# Altium PCB PCB.PcbDoc (part 1 of 2)
Units mm, origin at the board's own origin, x right, y up, seen from the top; angles counter-clockwise.
Board outline 94 x 82 mm, 2 copper layers (Top Layer, Bottom Layer); 51 components, 51 nets, 202 pads, 619 vias.
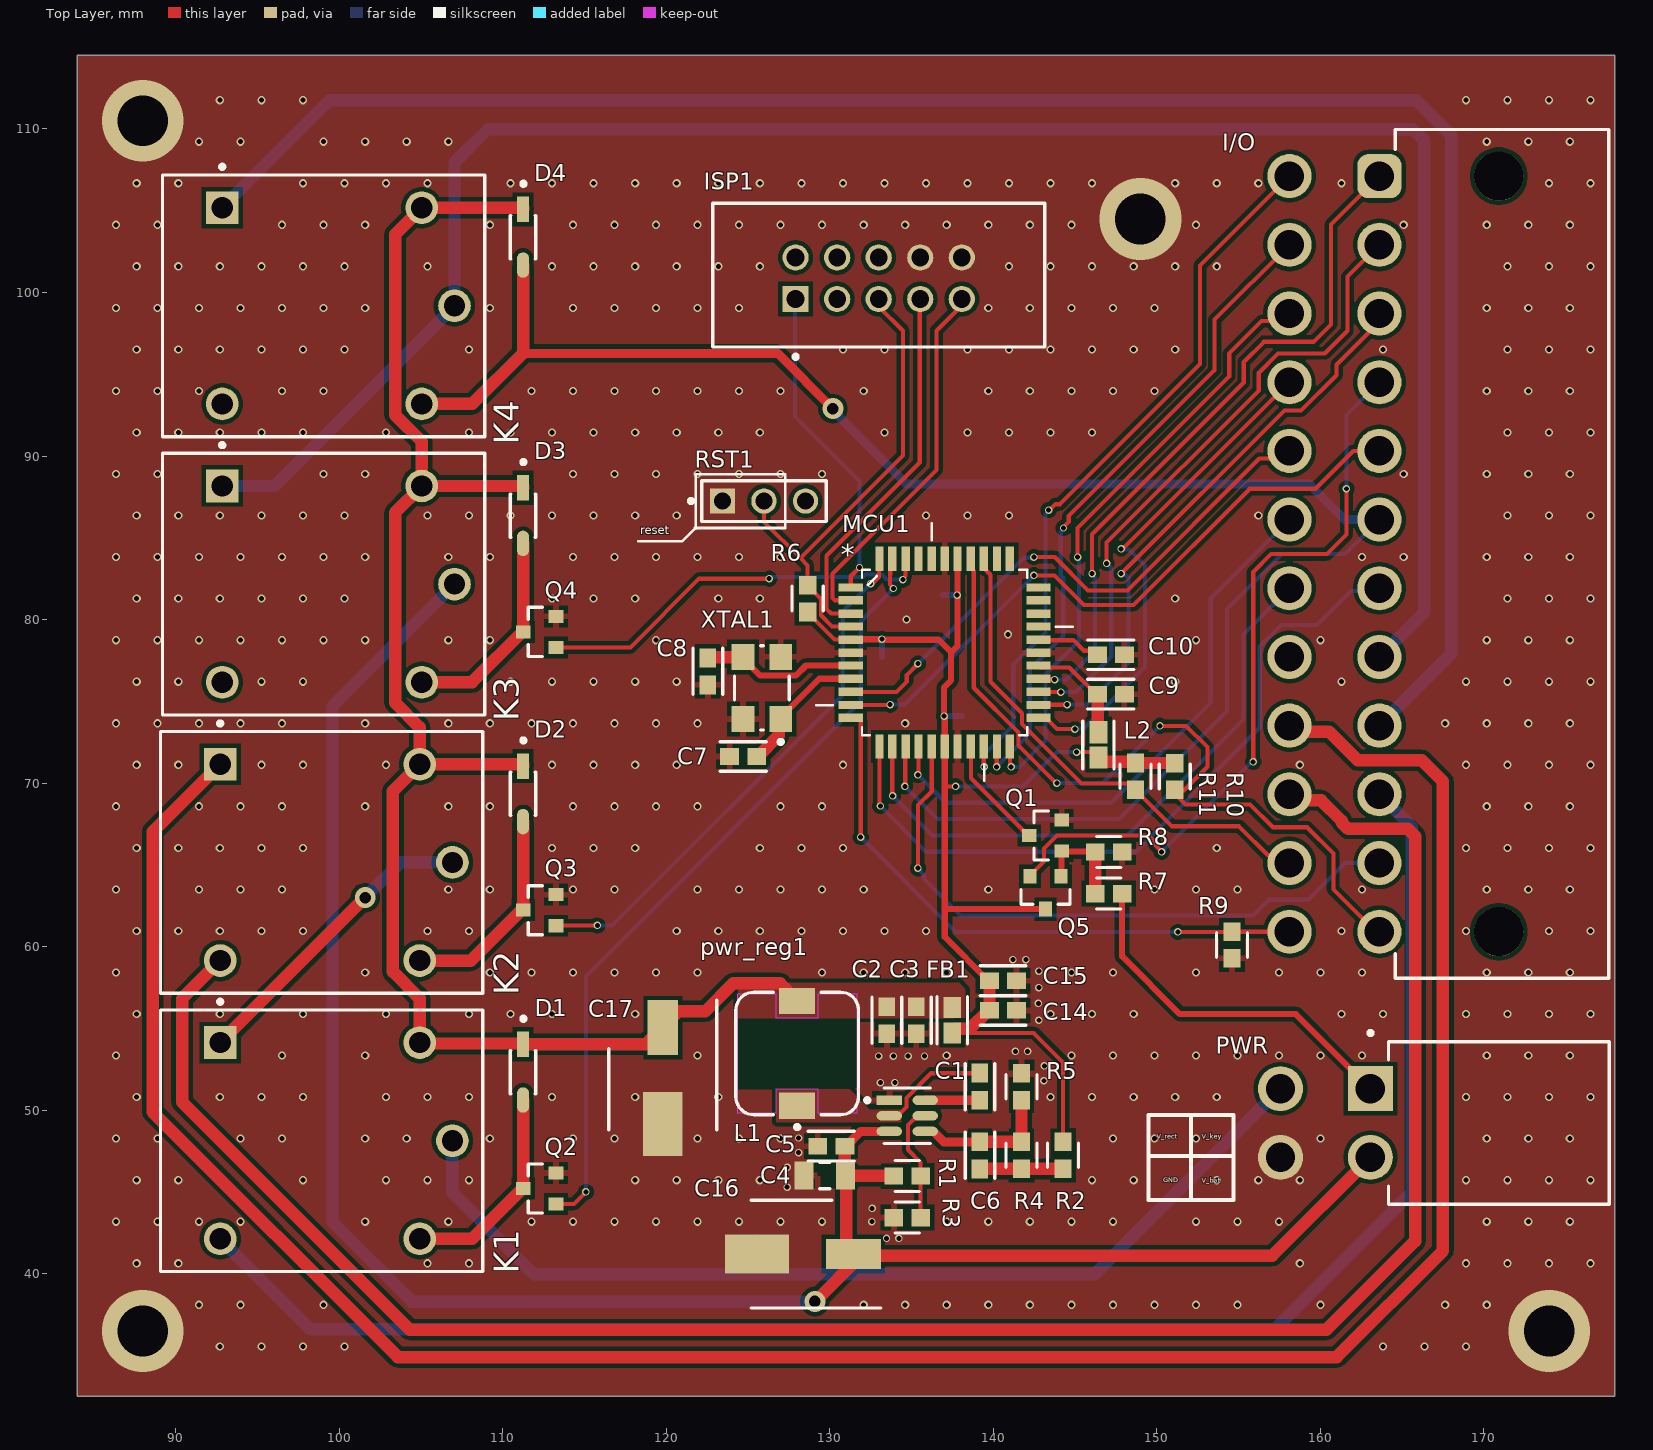
[diagram p0: Top Layer view]
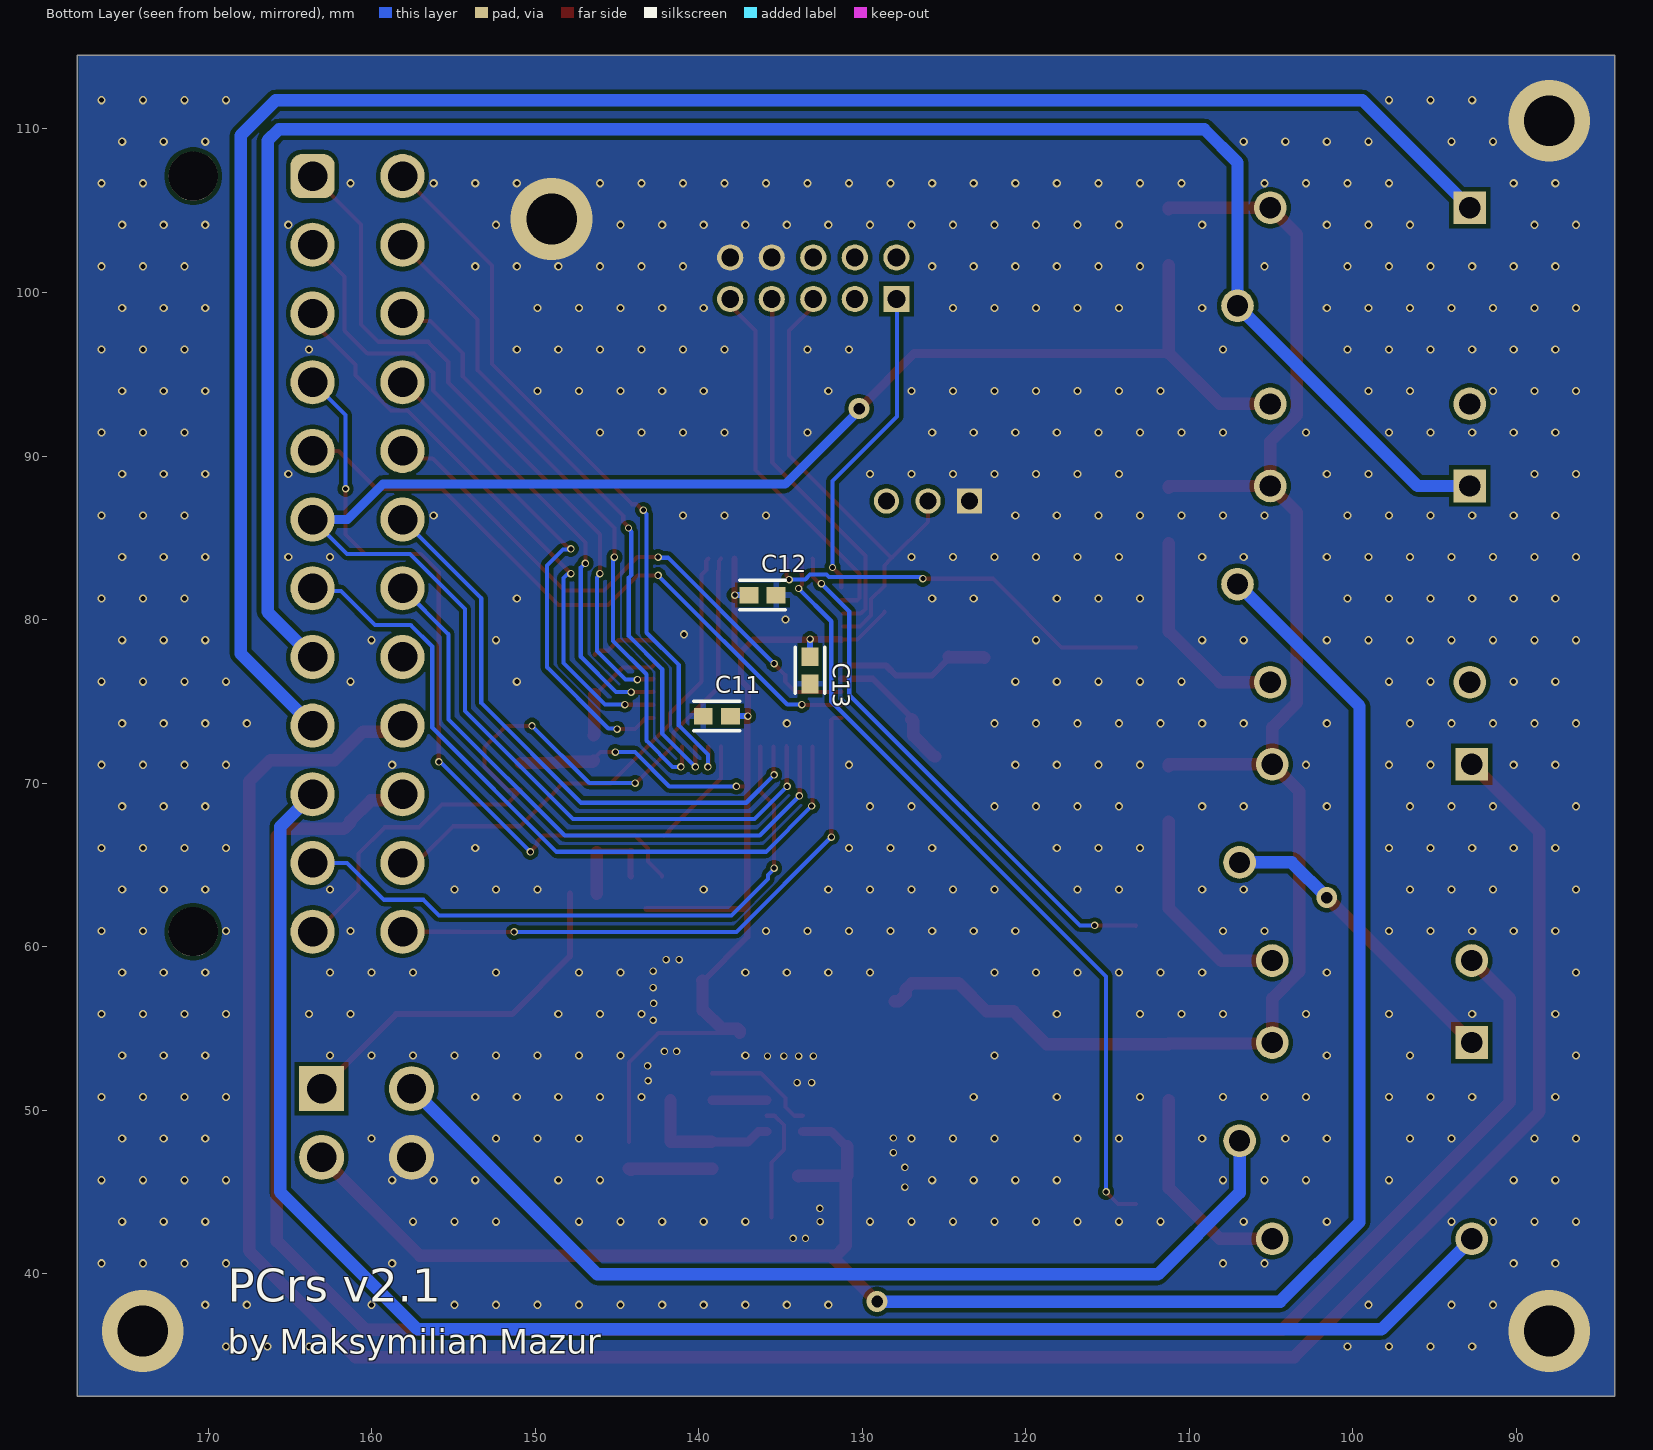
[diagram p1: Bottom Layer view, seen from below]
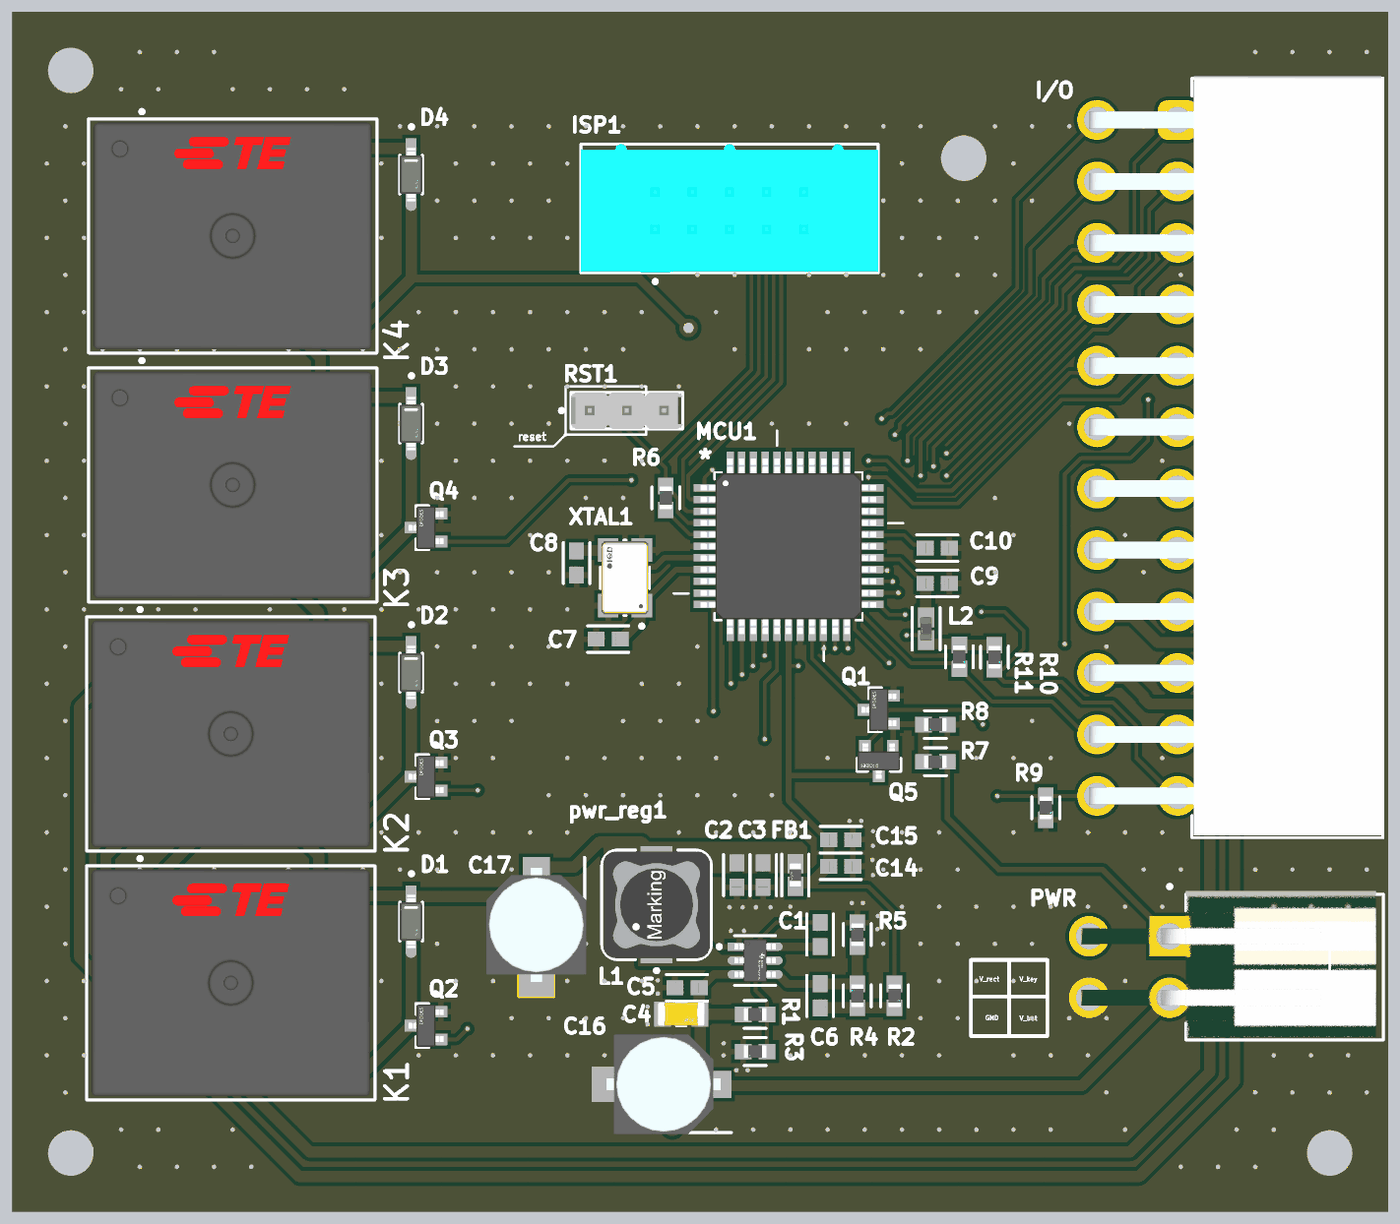
[diagram p2: 3D render of the assembled board from above, using the file's embedded part models]
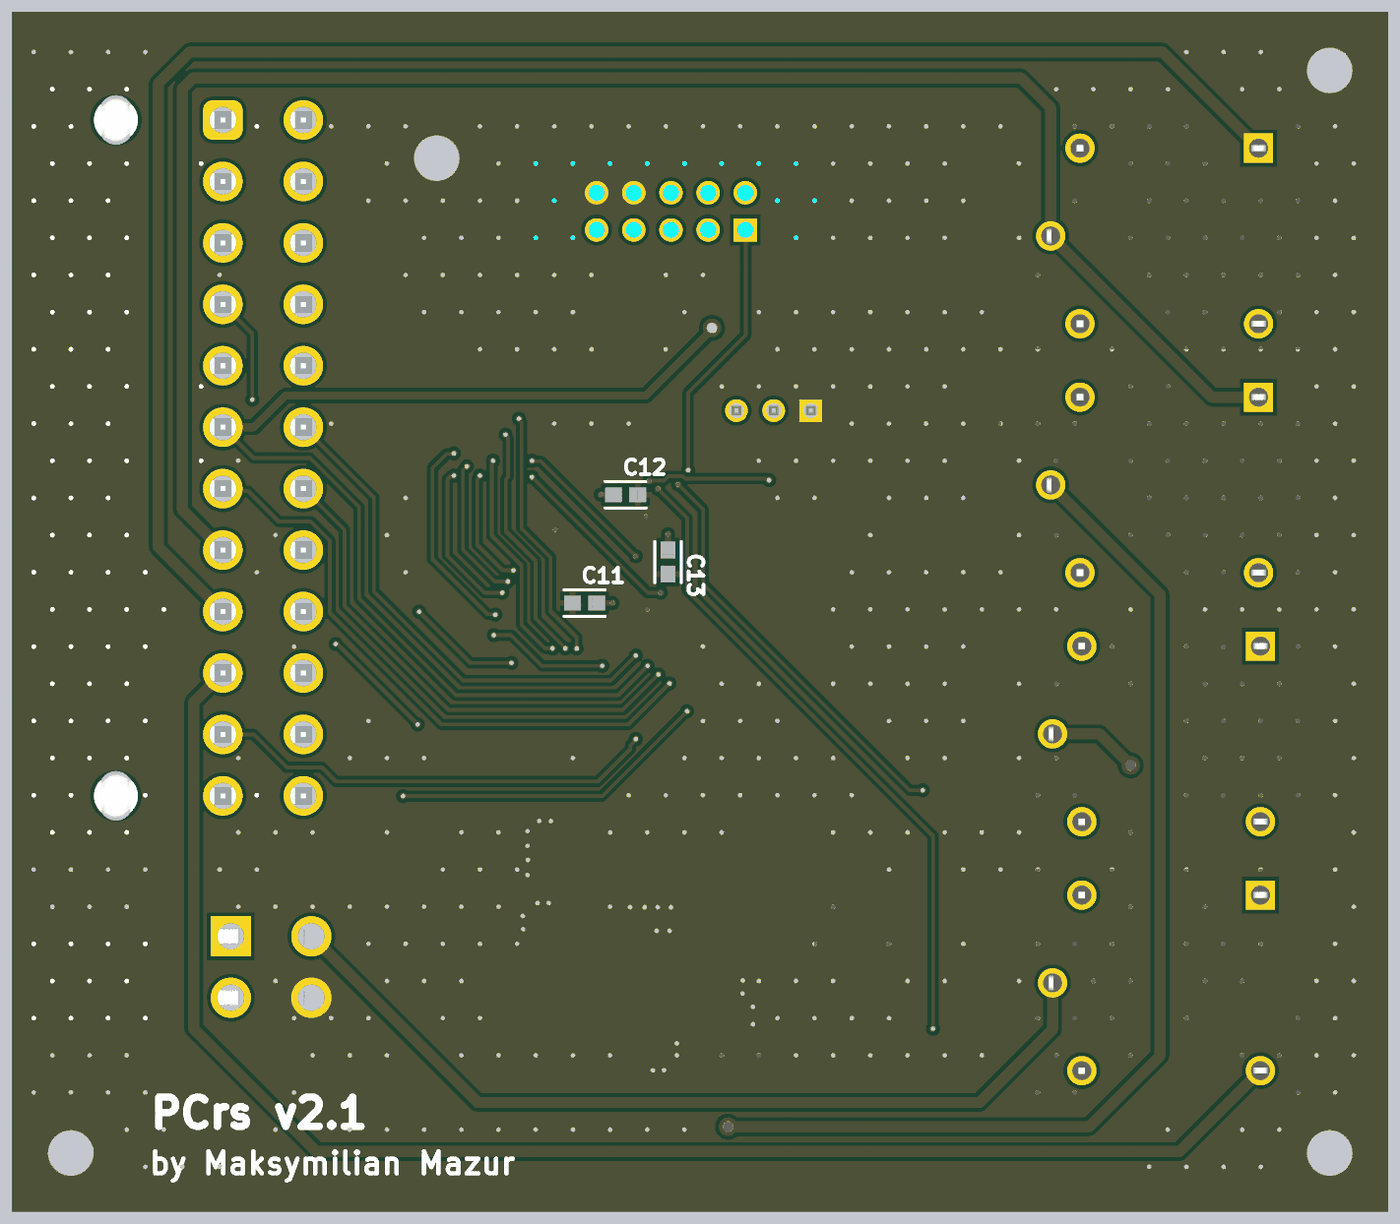
[diagram p3: 3D render of the assembled board from below, using the file's embedded part models]

## Layer stack, top to bottom
Top Solder: solder mask 0.0102, Solder Resist, Dk 3.5
Top Layer: signal copper 0.0356
Dielectric 1: dielectric 0.32, FR-4, Dk 4.8
Bottom Layer: signal copper 0.0356
Bottom Solder: solder mask 0.0102, Solder Resist, Dk 3.5

## Board outline
84,114.5 178,114.5 178,32.5 84,32.5

## Design rules (kind name [scope] priority, off if disabled: settings)
AssemblyTestPointUsage [All] p1: isadvanced=TRUE
AssemblyTestpoint [All] p1: isadvanced=TRUE testpointundercomponent=TRUE minsize=1.016 maxsize=2.54 preferedsize=1.524 minholesize=0 maxholesize=1.016 preferedholesize=0.813 testpointgrid=0.025 usegrid=TRUE gridtolerance=0 allowsidetop=TRUE allowsidebottom=TRUE
Clearance myClearance_1 [OnMid vs OnMid] p1: gap=0.254 ignorepadtopadclearanceinfootprint=FALSE except(0: Hole-Hole; 0.102: Arc-Arc Arc-Track Arc-Text Track-Track Track-Text Text-Text; 0.152: Arc-SMDPad Track-SMDPad SMDPad-SMDPad SMDPad-Text; 0.203: Arc-Via Track-Via Via-Text)
Clearance myClearance_2 [(ExistsOnLayer('Top Layer') Or ExistsOnLayer('Bottom Layer')) vs (ExistsOnLayer('Top Layer') Or ExistsOnLayer('Bottom Layer'))] p2: gap=0.254 ignorepadtopadclearanceinfootprint=FALSE except(0: Hole-Hole; 0.102: Arc-Arc Arc-Track Arc-Text Track-Track Track-Text Text-Text; 0.152: Arc-SMDPad Track-SMDPad SMDPad-SMDPad SMDPad-Text; 0.203: Arc-Via Track-Via Via-Text)
Clearance myClearance [All] p3: gap=0.254 ignorepadtopadclearanceinfootprint=FALSE
Clearance Clearance_1 [OnMid vs OnMid] p4: gap=0.254 ignorepadtopadclearanceinfootprint=FALSE except(0: Hole-Hole; 0.102: Arc-Arc Arc-Track Arc-Text Track-Track Track-Text Text-Text; 0.152: Arc-SMDPad Track-SMDPad SMDPad-SMDPad SMDPad-Text; 0.203: Arc-Via Track-Via Via-Text) sourcerule=54 cellrowname=All cellrowtype=0 cellcolname=All cellcoltype=0 innerlayers=TRUE
Clearance Clearance_2 [(ExistsOnLayer('Top Layer') Or ExistsOnLayer('Bottom Layer')) vs (ExistsOnLayer('Top Layer') Or ExistsOnLayer('Bottom Layer'))] p5: gap=0.254 ignorepadtopadclearanceinfootprint=FALSE except(0: Hole-Hole; 0.102: Arc-Arc Arc-Track Arc-Text Track-Track Track-Text Text-Text; 0.152: Arc-SMDPad Track-SMDPad SMDPad-SMDPad SMDPad-Text; 0.203: Arc-Via Track-Via Via-Text) sourcerule=54 cellrowname=All cellrowtype=0 cellcolname=All cellcoltype=0 outerlayers=TRUE
Clearance [All] p6 off: gap=0.254 ignorepadtopadclearanceinfootprint=FALSE ismatrix=TRUE
ComponentClearance [All] p1: isadvanced=TRUE gap=0.254 collisioncheckmode=3 verticalgap=0.254 showdistances=FALSE
FabricationTestPointUsage [All] p1: isadvanced=TRUE valid=0 allowmultiple=FALSE
FabricationTestpoint [All] p1: isadvanced=TRUE side=3 testpointundercomponent=TRUE minsize=1.016 maxsize=2.54 preferedsize=1.524 minholesize=0 maxholesize=1.016 preferedholesize=0.813 testpointgrid=0.025 allowsidetop=TRUE allowsidebottom=TRUE usegrid=TRUE gridtolerance=0
FanoutControl Fanout_BGA [IsBGA] p1: isadvanced=TRUE bgadir=Out bgaviamode=Centered fanoutstyle=Auto fanoutdirection=Alternating viagrid=0.025 // Fanout_BGA (Default Rule)
FanoutControl Fanout_LCC [IsLCC] p2: isadvanced=TRUE bgadir=Out bgaviamode=Centered fanoutstyle=Auto fanoutdirection=Alternating viagrid=0.025 // Fanout_LCC (Default Rule)
FanoutControl Fanout_SOIC [IsSOIC] p3: isadvanced=TRUE bgadir=Out bgaviamode=Centered fanoutstyle=Auto fanoutdirection=Alternating viagrid=0.025 // Fanout_SOIC (Default Rule)
FanoutControl Fanout_Small [(CompPinCount < 5)] p4: isadvanced=TRUE bgadir=Out bgaviamode=Centered fanoutstyle=Auto fanoutdirection=OutThenIn viagrid=0.025 // Fanout_Small (Default Rule)
FanoutControl Fanout_Default [All] p5: isadvanced=TRUE bgadir=Out bgaviamode=Centered fanoutstyle=Auto fanoutdirection=Alternating viagrid=0.025 // Fanout_Default (Default Rule)
Height [All] p1: isadvanced=TRUE minheight=0 maxheight=25.4 prefheight=12.7
HoleSize "MaxMinHoleSize JLCPCB" [All] p1: isadvanced=TRUE absolutevalues=TRUE maxlimit=6.299 minlimit=0.152 maxpercent=80.000 minpercent=20.000
HoleSize [All] p2 off: isadvanced=TRUE absolutevalues=TRUE maxlimit=2.54 minlimit=0.025 maxpercent=80.000 minpercent=20.000
HoleToHoleClearance [All] p1: isadvanced=TRUE gap=0.254 allowstackedmicrovias=TRUE
LayerPairs [All] p1: isadvanced=TRUE enforce=TRUE
MinimumSolderMaskSliver [All] p1: isadvanced=TRUE minsoldermaskwidth=0.254
NetAntennae [All] p1: isadvanced=TRUE netantennaetolerance=0
PasteMaskExpansion [All] p1 off: isadvanced=TRUE expansion=0
PlaneClearance [All] p1: isadvanced=TRUE clearance=0.508
PlaneConnect [All] p1: isadvanced=TRUE planeconnectstyle=Relief reliefexpansion=0.508 reliefentries=4 reliefconductorwidth=0.254 reliefairgap=0.254
PolygonConnect PolygonConnectStyle_3 [InNetClass('NewClass')] p1: connectstyle=Direct reliefconductorwidth=0.254 reliefentries=4 polygonreliefangle="90 Angle" airgapwidth=0.254
RoutingCorners [All] p1: isadvanced=TRUE cornerstyle=45-Degree minsetback=2.54 maxsetback=2.54
RoutingPriority [All] p1: isadvanced=TRUE routingpriority=0
RoutingVias "RoutingVias JLCPCB_2" [All] p1 off: isadvanced=TRUE holewidth=0.305 width=0.457 viastyle="Through Hole" minholewidth=0.152 minwidth=0.254 maxholewidth=0.711 maxwidth=1.27
ShortCircuit [All] p1: isadvanced=TRUE allowed=FALSE
SilkToSilkClearance [All] p1: isadvanced=TRUE silktosilkclearance=0.254
SilkToSolderMaskClearance [IsPad] p1: isadvanced=TRUE minsilkscreentomaskgap=0.254 clearancetoexposedcopper=TRUE
SolderMaskExpansion [IsVia] p1: isadvanced=TRUE expansion=0.102 istentingtop=TRUE
SupplyNets "Schematic Supply Nets_15" [InNet('VCC_rect')] p1: voltage=0.000
SupplyNets "Schematic Supply Nets_12" [InNet('VCC_k')] p2: voltage=0.000
SupplyNets "Schematic Supply Nets_11" [InNet('VCC_bat')] p3: voltage=0.000
SupplyNets "Schematic Supply Nets_10" [InNet('GND')] p4: voltage=0.000
SupplyNets "Schematic Supply Nets_9" [InNet('VCC_k')] p5: isadvanced=TRUE voltage=0.000
SupplyNets "Schematic Supply Nets_8" [InNet('VCC_bat')] p6: isadvanced=TRUE voltage=0.000
SupplyNets "Schematic Supply Nets_7" [InNet('VCC_rect')] p7: isadvanced=TRUE voltage=0.000
SupplyNets "Schematic Supply Nets_5" [InNet('GND')] p8: isadvanced=TRUE voltage=0.000
SupplyNets "Schematic Supply Nets_3" [InNet('VCC_rect')] p9: isadvanced=TRUE voltage=0.000
SupplyNets "Schematic Supply Nets_2" [InNet('VCC_bat')] p10: isadvanced=TRUE voltage=0.000
SupplyNets "Schematic Supply Nets_1" [InNet('VCC_k')] p11: isadvanced=TRUE voltage=0.000
SupplyNets "Schematic Supply Nets" [InNet('GND')] p12: isadvanced=TRUE voltage=0.000
SupplyNets "Schematic Supply Nets_19" [InNet('V_reg')] p13: isadvanced=TRUE voltage=0.000
SupplyNets "Schematic Supply Nets_14" [InNet('VCC_rect')] p14: isadvanced=TRUE voltage=0.000
UnRoutedNet [All] p1: isadvanced=TRUE
UnpouredPolygon [All] p1: isadvanced=TRUE
Width [All] p1: maxlimit=0.762 minlimit=0.254 preferedwidth=0.381 minimp=50.000000 maximp=50.000000 favimp=50.000000
4 further rules are at their usual default settings.

## Components (designator, comment, footprint, x,y, rotation, side; value= is the part's Value field where it differs from the comment)
C1 "0.1uF" FP-CL10-IPC_A 139.192,51.435 r90 top
C2 "22uF" FP-CL10-IPC_A 133.5,55.5 r270 top
C3 "22uF" FP-CL10-IPC_A 135.3,55.5 r270 top
C4 "10uF" FP-CL31-IPC_C 129.7,46 r180 top
C5 "1uF" FP-CL10-IPC_A 130.1,47.8 r180 top
C6 "75pF" FP-CL10-IPC_A 139.192,47.244 r90 top
C7 "22pF" FP-CL10-IPC_A 124.714,71.628 r0 top
C8 "22pF" FP-CL10-IPC_A 122.555,76.835 r90 top
C9 "100nF" FP-CL10-IPC_A 147.193,75.438 r0 top
C10 "100nF" FP-CL10-IPC_A 147.193,77.851 r0 top
C11 "22uF" FP-CL10-IPC_A 138.9,74.1 r0 bottom
C12 "10uF" FP-CL10-IPC_A 136.1,81.5 r180 bottom
C13 "10uF" FP-CL10-IPC_A 133.2,76.9 r270 bottom
C14 "22uF" FP-CL10-IPC_A 140.6,56.1 r0 top
C15 "22uF" FP-CL10-IPC_A 140.604,57.922 r0 top
C16 "220uF" CAPAE660X810N#1 128.5,41.2 r180 top
C17 "220uF" CAPAE660X810N#2 119.8,52.1 r270 top locked
D1 "1N5819HW-7-F" FP-SOD123-IPC_A 111.252,52.324 r270 top
D2 "1N5819HW-7-F" FP-SOD123-IPC_A 111.252,69.342 r270 top
D3 "1N5819HW-7-F" FP-SOD123-IPC_A 111.252,86.36 r270 top
D4 "1N5819HW-7-F" FP-SOD123-IPC_A 111.252,103.378 r270 top
FB1 "test" FP-BLM18-0_15-t0_8-IPC_A 137.5,55.5 r270 top
I/O "I/O" 649024227222 171.115,84.015 r90 top
ISP1 "30310-6002HB" 3M-30310-6002HB-10_V 133,100.87 r0 top
K1 "RM51-3011-85-1005" FP-1-1721150-0-MFG 98.933,48.133 r0 top
K2 "RM51-3011-85-1005" FP-1-1721150-0-MFG 98.933,65.151 r0 top
K3 "RM51-3011-85-1005" FP-1-1721150-0-MFG 99.06,82.169 r0 top
K4 "RM51-3011-85-1005" FP-1-1721150-0-MFG 99.06,99.187 r0 top
L1 "pwr_inductor" WE-PD_7345 128.016,53.467 r90 top
L2 "10uH" FP-CBMF1608-IPC_A 146.431,72.336 r270 top
MCU1 "ATMEGA32A-AU" QFP80P1200X1200X120-44N 137.033,77.978 r0 top
PWR "power" FP-1586042-4-MFG 170.668,49.217 r90 top
pwr_reg1 "TPS54202DDCR" FP-DDC0006A-IPC_B 134.747,49.657 r0 top
Q1 "2N7002-7-F" FP-SOT23-MFG 143.2,66.8 r180 top
Q2 "2N7002-7-F" FP-SOT23-MFG 112.268,45.212 r180 top
Q3 "2N7002-7-F" FP-SOT23-MFG 112.268,62.23 r180 top
Q4 "2N7002-7-F" FP-SOT23-MFG 112.268,79.248 r180 top
Q5 "2N7002-7-F" FP-SOT23-MFG 143.2,63.3 r270 top
R1 "511k" FP-CRCW0603-e3-IPC_A 134.747,45.974 r0 top
R2 "49.9R" FP-CRCW0603-e3-IPC_A 144.272,47.244 r270 top
R3 "105k" FP-CRCW0603-e3-IPC_A 134.747,43.434 r180 top
R4 "100k" FP-CRCW0603-e3-IPC_A 141.732,47.244 r90 top
R5 "13.3k" FP-CRCW0603-e3-IPC_A 141.732,51.435 r90 top
R6 "10k" FP-CRCW0603-e3-IPC_A 128.651,81.28 r90 top
R7 "220k" FP-CRCW0603-e3-IPC_A 147.066,63.246 r0 top
R8 "150k" FP-CRCW0603-e3-IPC_A 147.066,65.786 r180 top
R9 "10k" FP-CRCW0603-e3-IPC_A 154.6,60.1 r270 top
R10 "10k" FP-CRCW0603-e3-IPC_A 151.1,70.4 r270 top
R11 "50k" FP-CRCW0603-e3-IPC_A 148.7,70.415 r270 top
RST1 "rst" MOLX-22-28-4033_V 125.984,87.249 r0 top
XTAL1 "8MHz" FP-LFXTAL055663REEL-MFG 125.857,75.819 r90 top

## Footprints (in the part's own frame and the unit in brackets; to place one, negate y for a bottom-side part, rotate by r counter-clockwise, add the part's x,y. Pads: shape width x height; smd on the part's side, far side on the other; paste and mask are expansions set on the pad)
3M-30310-6002HB-10_V [mm] "CONN, 10-Leads, Body 20.3x8.4mm, Pitch 2.54mm"
  rect 1.6x1.6 hole 1.09: 1(-5.08,-1.27)
  round 1.6 hole 1.09: 2(-5.08,1.27) 3(-2.54,-1.27) 4(-2.54,1.27) 5(0,-1.27) 6(0,1.27) 7(2.54,-1.27) 8(2.54,1.27) 9(5.08,-1.27) 10(5.08,1.27)
  silkscreen extent -10.15,-4.92 10.15,4.58, body extent -10.15,-4.2 10.15,4.61, height 8.89
649024227222 [mm] "4.20mm Male Dual Row Angled Header with Mounting Pegs, 24p"
  rrect50% 2.7x2.7 hole 1.8: 1(23.1,7.5)
  round 2.7 hole 1.8: 2(18.9,7.5) 3(14.7,7.5) 4(10.5,7.5) 5(6.3,7.5) 6(2.1,7.5) 7(-2.1,7.5) 8(-6.3,7.5) 9(-10.5,7.5) 10(-14.7,7.5) 11(-18.9,7.5) 12(-23.1,7.5) 13(23.1,13) 14(18.9,13) 15(14.7,13) 16(10.5,13) 17(6.3,13) 18(2.1,13) 19(-2.1,13) 20(-6.3,13) 21(-10.5,13) 22(-14.7,13) 23(-18.9,13) 24(-23.1,13)
  round 3 hole 3 unplated: MH1(-23.1,0.2) MH2(23.1,0.2)
  silkscreen extent -25.95,-6.52 25.95,6.52, body extent -25.8,-6.4 26.1,13.57, height 11.43
CAPAE660X810N#1 [mm]
  rect 3.35x1.85 smd: 1(-2.95,0)
  rect 3.9x2.4 smd: 2(2.95,0)
  silkscreen extent -4.62,-3.3 3.3,3.3, body extent -3.9,-3.4 3.9,3.4, height 8.1
CAPAE660X810N#2 [mm]
  rect 3.35x1.85 smd: 1(-2.95,0)
  rect 3.9x2.4 smd mask+0.102: 2(2.95,0)
  silkscreen extent -4.62,-3.3 3.3,3.3, body extent -3.9,-3.4 3.9,3.4, height 8.1
FP-1-1721150-0-MFG [mm]
  rect 2x2 hole 1.3 paste-2539.97 mask+0: 1(-6.2,6)
  round 2 hole 1.3 paste-2539.97 mask+0: 2(6,6) 3(8,0) 4(-6.2,-6) 5(6,-6)
  silkscreen extent -9.85,-8 9.85,8.62, body extent -9.95,-8.1 9.95,8.1, height 0.25
FP-1586042-4-MFG [mm]
  rect 2.75x2.75 hole 1.8 paste-2539.97 mask+0: 1(2.1,7.6)
  round 2.75 hole 1.8 paste-2539.97 mask+0: 2(-2.1,7.6) 3(2.1,13.1) 4(-2.1,13.1)
  silkscreen extent -4.97,-7 5.62,7.72, body extent -5.07,-7.1 5.07,14.58, height 0.25
FP-BLM18-0_15-t0_8-IPC_A [mm]
  rect 1.306x1.058 smd paste+0 mask+0: 1(-0.776,0) 2(0.776,0)
  silkscreen extent -1.43,-0.93 1.43,0.93, body extent -1.93,-1.03 1.93,1.03, height 0.25
FP-CBMF1608-IPC_A [mm]
  rect 1.355x1.106 smd paste+0 mask+0: 1(-0.775,0) 2(0.775,0)
  silkscreen extent -1.45,-0.95 1.45,0.95, body extent -1.95,-1.05 1.95,1.05, height 0.25
FP-CL10-IPC_A [mm]
  rect 1.158x1.012 smd paste+0 mask+0: 1(-0.827,0) 2(0.827,0)
  silkscreen extent -1.41,-0.91 1.41,0.91, body extent -1.91,-1.01 1.91,1.01, height 0.25
FP-CL31-IPC_C [mm]
  rect 1.154x1.706 smd paste+0 mask+0: 1(-1.276,0) 2(1.276,0)
  silkscreen extent -0.32,-0.8 0.32,0.8, body extent -1.95,-1 1.95,1, height 0.25
FP-CRCW0603-e3-IPC_A [mm]
  rect 1.135x1.062 smd paste+0 mask+0: 1(-0.815,0) 2(0.815,0)
  silkscreen extent -0.75,-0.95 0.75,0.95, body extent -1.88,-1.03 1.88,1.03, height 0.25
FP-DDC0006A-IPC_B [mm]
  rect 1.554x0.572 smd paste+0 mask+0: 1(-1.1,0.95)
  rrect100% 1.554x0.572 smd paste+0 mask+0: 2(-1.1,0) 3(-1.1,-0.95) 4(1.1,-0.95) 5(1.1,0) 6(1.1,0.95)
  silkscreen extent -2.57,-1.7 1.4,1.7, body extent -2.13,-1.7 2.13,1.7, height 0.25
FP-LFXTAL055663REEL-MFG [mm]
  rect 1.6x1.4 smd paste+0 mask+0: 1(-1.9,-1.15) 2(1.9,-1.15) 3(1.9,1.15) 4(-1.9,1.15)
  silkscreen extent -3.42,-1.67 2.58,1.67, body extent -2.8,-1.95 2.8,1.95, height 0.25
FP-SOD123-IPC_A [mm]
  rect 1.557x0.742 smd paste+0 mask+0: 1(-1.7,0)
  rrect100% 1.557x0.742 smd paste+0 mask+0: 2(1.7,0)
  silkscreen extent -3.39,-0.78 1.33,0.78, body extent -2.98,-1.28 2.98,1.28, height 0.25
FP-SOT23-MFG [mm]
  rect 0.9x0.8 smd paste+0 mask+0: 1(-1,0.95) 2(-1,-0.95) 3(1,0)
  silkscreen extent -0.18,-1.5 0.7,1.5, body extent -1.55,-1.6 1.55,1.6, height 0.25
MOLX-22-28-4033_V [mm] "THD, 3-Leads, Body 7.62x2.49mm, Pitch 2.54mm"
  rect 1.55x1.55 hole 1.02: 1(-2.54,0)
  round 1.55 hole 1.02: 2(0,0) 3(2.54,0)
  silkscreen extent -4.58,-1.25 3.81,1.25, body extent -3.81,-1.24 3.81,1.24, height 8.38
QFP80P1200X1200X120-44N [mil]
  rect 58x20 smd: 1(-226,157) 2(-226,126) 3(-226,94) 4(-226,63) 5(-226,31) 6(-226,0) 7(-226,-31) 8(-226,-63) 9(-226,-94) 10(-226,-126) 11(-226,-157) 23(226,-157) 24(226,-126) 25(226,-94) 26(226,-63) 27(226,-31) 28(226,0) 29(226,31) 30(226,63) 31(226,94) 32(226,126) 33(226,157)
  rect 20x58 smd: 12(-157,-226) 13(-126,-226) 14(-94,-226) 15(-63,-226) 16(-31,-226) 17(0,-226) 18(31,-226) 19(63,-226) 20(94,-226) 21(126,-226) 22(157,-226) 34(157,226) 35(126,226) 36(94,226) 37(63,226) 38(31,226) 39(0,226) 40(-31,226) 41(-63,226) 42(-94,226) 43(-126,226) 44(-157,226)
  silkscreen extent -309,-309 308,311, body extent -236,-236 236,236, height 47
WE-PD_7345 [mm] "SMT Shielded Power Inductor, 2-leads, body 7.3x7.3mm"
  rect 1.6x2.2 smd: 1(-3.2,0) 2(3.2,0)
  Top Layer keep-out region: -3.65,-3.65 -3.65,-1.3 -2.2,-1.3 -2.2,1.3 -3.65,1.3 -3.65,3.65 3.65,3.65 3.65,1.3 2.2,1.3 2.2,-1.3 3.65,-1.3 3.65,-3.65
  silkscreen extent -4.62,-3.75 3.75,3.75, body extent -3.65,-3.65 3.65,3.65, height 3.91

## Part data
C1: library part CMP-13271-000587-1, "Cap Ceramic 0.1uF 25V SMD 0603", Case/Package=0603, Dielectric=X7R, Max Operating Temperature=125°C, Min Operating Temperature=-55°C, Package Quantity=10000, Tolerance=10%, Voltage=50V, Capacitance=0.1uF, Depth=0.8mm, Height=0.8mm, Lead Free="Lead Free", Length=1.6mm, Material=Ceramic, Mount="Surface Mount", Packaging="Tape and Reel", Radiation Hardening=No, Thickness=0.035inch, Voltage Rating=50V, Voltage Rating (DC)=50V, Width=0.031inch
C2 C3 C14 C15: library part CMP-13271-000587-1, "Cap Ceramic 22uF 25V X7R LOW ESR SMD 0603", Case/Package=0603, Dielectric=X7R, Max Operating Temperature=125°C, Min Operating Temperature=-55°C, Package Quantity=10000, Tolerance=10%, Voltage=50V, Capacitance=22uF, Depth=0.8mm, Height=0.8mm, Lead Free="Lead Free", Length=1.6mm, Material=Ceramic, Mount="Surface Mount", Packaging="Tape and Reel", Radiation Hardening=No, Thickness=0.035inch, Voltage Rating=50V, Voltage Rating (DC)=50V, Width=0.031inch
C4: library part CMP-13271-000016-1, "CAP CER 10uF 25V X5R 1206", Manufacturer=Samsung, Manufacturer Part Number=CL31A106KBHNNNE, Package=CL31, Temperature="-55°C to +85°C", Temperature Characteristic=X5R, Temperature Coefficient=15%, Temperature Range High=+85°C, Temperature Range Low=-55°C, Tolerance=10%, Voltage=50V, Automotive=No, Capacitance=10uF, Category=Cap, ComponentLink2Description=Datasheet, ComponentLink2URL=http://www.samsungsem.com/kr/support/product-search/mlcc/__icsFiles/afieldfile/2018/06/21/CL31A106KBHNNNE.pdf, Device Class L1="Passive Components", Device Class L2=Capacitors, Device Class L3="Ceramic Capacitors", Digikey Description="CAP CER 10UF 50V X5R 1206", Height=1.8mm, Ipc Land Pattern Name=CAPC320160X160, Lead Free=Yes, Material=Ceramic, Octopart=https://octopart.com/cl31a106kbhnnne-samsung-19832778, RoHS=TRUE, Voltage Rating=50V
C5: library part CMP-13271-000587-1, "Cap Ceramic 1uF 25V SMD 0603", Case/Package=0603, Dielectric=X7R, Max Operating Temperature=125°C, Min Operating Temperature=-55°C, Package Quantity=10000, Tolerance=10%, Voltage=50V, Capacitance=1uF, Depth=0.8mm, Height=0.8mm, Lead Free="Lead Free", Length=1.6mm, Material=Ceramic, Mount="Surface Mount", Packaging="Tape and Reel", Radiation Hardening=No, Thickness=0.035inch, Voltage Rating=50V, Voltage Rating (DC)=50V, Width=0.031inch
C6: library part CMP-13271-000587-1, "Cap Ceramic 75pF 25V SMD 0603", Case/Package=0603, Dielectric=X7R, Max Operating Temperature=125°C, Min Operating Temperature=-55°C, Package Quantity=10000, Tolerance=10%, Voltage=50V, Capacitance=75pF, Depth=0.8mm, Height=0.8mm, Lead Free="Lead Free", Length=1.6mm, Material=Ceramic, Mount="Surface Mount", Packaging="Tape and Reel", Radiation Hardening=No, Thickness=0.035inch, Voltage Rating=50V, Voltage Rating (DC)=50V, Width=0.031inch
C7 C8: library part CMP-13271-000587-1, "Cap Ceramic 22pF 25V SMD 0603", Case/Package=0603, Dielectric=X7R, Max Operating Temperature=125°C, Min Operating Temperature=-55°C, Package Quantity=10000, Tolerance=10%, Voltage=50V, Capacitance=22pF, Depth=0.8mm, Height=0.8mm, Lead Free="Lead Free", Length=1.6mm, Material=Ceramic, Mount="Surface Mount", Packaging="Tape and Reel", Radiation Hardening=No, Thickness=0.035inch, Voltage Rating=50V, Voltage Rating (DC)=50V, Width=0.031inch
C9 C10: library part CMP-13271-000587-1, "Cap Ceramic 100nF 50V X7R ±10% Pad SMD 0603 +125°C T/R", Case/Package=0603, Dielectric=X7R, Max Operating Temperature=125°C, Min Operating Temperature=-55°C, Package Quantity=10000, Tolerance=10%, Voltage=50V, Capacitance=100nF, Depth=0.8mm, Height=0.8mm, Lead Free="Lead Free", Length=1.6mm, Material=Ceramic, Mount="Surface Mount", Packaging="Tape and Reel", Radiation Hardening=No, Thickness=0.035inch, Voltage Rating=50V, Voltage Rating (DC)=50V, Width=0.031inch
C11: library part CMP-13271-000587-1, "Cap Ceramic 22uF 10V X7R ±10% Pad SMD 0603 +125°C T/R", Capacitance=100nF, Case/Package=0603, Dielectric=X7R, Max Operating Temperature=125°C, Min Operating Temperature=-55°C, Package Quantity=10000, Tolerance=10%, Voltage=50V, Depth=0.8mm, Height=0.8mm, Lead Free="Lead Free", Length=1.6mm, Material=Ceramic, Mount="Surface Mount", Packaging="Tape and Reel", Radiation Hardening=No, Thickness=0.035inch, Voltage Rating=50V, Voltage Rating (DC)=50V, Width=0.031inch
C12 C13: library part CMP-13271-000587-1, "Cap Ceramic 10uF 10V X7R ±10% Pad SMD 0603 +125°C T/R", Capacitance=100nF, Case/Package=0603, Dielectric=X7R, Max Operating Temperature=125°C, Min Operating Temperature=-55°C, Package Quantity=10000, Tolerance=10%, Voltage=50V, Depth=0.8mm, Height=0.8mm, Lead Free="Lead Free", Length=1.6mm, Material=Ceramic, Mount="Surface Mount", Packaging="Tape and Reel", Radiation Hardening=No, Thickness=0.035inch, Voltage Rating=50V, Voltage Rating (DC)=50V, Width=0.031inch
C16: library part SC1C227M6L07KVR, "Cap 16V 220uF /  / Input current decap", Manufacturer_Name=SAMWHA, Datasheet Link=https://octopart.com/datasheet/sc1c227m6l07kvr-samwha-30812620, Height=8.1mm, Manufacturer_Part_Number=SC1C227M6L07KVR
C17: library part SC1C227M6L07KVR, "Cap 16V 220uF /  / Relay coils bulk capacitor", Manufacturer_Name=SAMWHA, Datasheet Link=https://octopart.com/datasheet/sc1c227m6l07kvr-samwha-30812620, Height=8.1mm, Manufacturer_Part_Number=SC1C227M6L07KVR
D1 D2 D3 D4: library part CMP-0303-00003-3, "DIODE SCHOTTKY 40V 1A SOD123", Average Rectified Current=1A, Capacitance=110pF, Case/Package=SOD-123-2, Forward Voltage=450mV, Max Forward Surge Current (Ifsm)=25A, Max Operating Temperature=125°C, Max Power Dissipation=450mW, Max Repetitive Reverse Voltage (Vrrm)=40V, Min Operating Temperature=-65°C, Package Quantity=3000, Peak Reverse Current=50uA, Contact Plating=Tin, Current Rating=1A, Element Configuration=Single, Forward Current=1A, Height=1.25mm, Lead Free="Lead Free", Length=2.85mm, Max Reverse Voltage (DC)=40V, Number of Pins=2, Output Current=1A, Packaging="Tape and Reel", Peak Non-Repetitive Surge Current=25A, Polarity=Standard, Radiation Hardening=No, REACH SVHC="No SVHC", Termination=SMD/SMT, Voltage Rating (DC)=40V, Weight=0.000353oz, Width=1.7mm
FB1: library part CMP-0686-00557-7, "Chip Ferrite Bead, 0603 /  / For testing purpose", Case Code (Imperial)=0603, Case Code (Metric)=1608, Current Rating=2A, DC Resistance (DCR)=50mR, Frequency=100MHz, Max Operating Temperature=125°C, Min Operating Temperature=-55°C, Package Quantity=1, Tolerance=25%, Case/Package=0603, Core Material=Ferrite, DC Current=2A, Depth=0.8mm, Height=0.8mm, Impedance=120R, Lead Free="Lead Free", Length=1.6mm, Material=Steel, Max Current Rating=2A, Max DC Current=2A, Number of Circuits=1, Number of Lines=1, Number of Pins=2, Packaging="Tape and Reel", Radiation Hardening=No, REACH SVHC="No SVHC", RoHS Compliant=Yes, Shielding=Unshielded, Termination=SMD/SMT, Test Frequency=100MHz, Width=0.8mm
I/O: library part CMP-1502-00539-2, Color=White, Contact Resistance=10mΩ, Current Rating=6A, Insulation Resistance=1GΩ, Max Operating Temperature=105°C, Min Operating Temperature=-40°C, Operating Supply Voltage=600V, Connector Type="Male Pin, Socket", Contact Material=Copper, Contact Plating=Tin, Fastening Type=Ramp, Gender=Male, Height=12.8mm, Lead Pitch=4.2mm, Length=51.6mm, Mount="Through Hole", NexarPartId=23024662, Number Of Contacts=24, Number of Pins=24, Number of Positions=24, Number of Rows=2, Pitch=4.2mm, REACH SVHC=Unknown, RoHS=Compliant, Row Spacing=4.191mm, Termination=Solder, Width=51.7mm
ISP1: library part CMP-2000-05031-1, "Male Header, Pitch 2.54 mm, 2 x 5 Position, Height 9.3 mm, Tail Length 2.79 mm, -55 to 105 degC, RoHS, Bulk", Current Rating=1A, Manufacturer=3M, Brand=3MElectronicSolutionsDivision, Contact Gender=Pin(Male), Contact Material=Brass, Contact Plating=Gold, Datasheet URL=http://datasheet.octopart.com/30310-6002HB-3M-datasheet-11537585.pdf, Datasheet Version=Apr-12, Factory Pack Quantity=1000, Housing Material=Polyester, Manufacturer URL=http://www.3m.com/, Mating Post Length=5.99mm, Mounting Angle=Straight, Mounting Style=StraightPin, Number of Positions=10Position, Number of Rows=2Row, Packaging=Tray, Pitch=2.54mm, Product=Headers, Product Category=Headers&WireHousings, RoHS=Details, Row Spacing=2.54mm, Series=303, Termination Post Length=2.79mm, Termination Style=ThroughHole, Type=Shrouded
K1 K2 K3 K4: library part CMP-03395-000112-1, "Relpol / RM51-3011-85-1005 / RELAY 10A 5V", Ambient Temperature Range High=+70°C, Ambient Temperature Range Low=-30°C, Coil Power=360mW, Coil Resistance=70Ω, Coil Voltage=5V, Current Rating=10A, Manufacturer=TE, Manufacturer Part Number=1-1721150-0, Automotive=No, Category=Relay, Coil Type=Non-Latching, ComponentLink2Description=Datasheet, ComponentLink2URL=https://www.te.com/usa-en/product-1-1721150-0.html?te_bu=Cor&te_type=other&te_campaign=oct_glo_cor-oct-global-oth-prtnr-fy19-oct-octo-buy-bom_sma-298_2&elqCampaignId=35216, Device Class L1=Electromechanical, Device Class L2=Relays, Device Class L3="Power Relays", Digikey Description="RELAY GEN PURPOSE SPDT 10A 5V", Height=16.3mm, Lead Free=Yes, Number Of Contacts=1, Octopart=https://octopart.com/1-1721150-0-te+connectivity-41294869, Package=1-1721150-0, RoHS=TRUE, Standoff Height=0.2mm, Switching Current=10A, Throw Configuration=SPDT
L1: library part CMP-0227-00155-2, "15uF, 2.7A  HPI0630-150", Ambient Temperature Range High=85°C, Ambient Temperature Range Low=-40°C, Current Rating=2.7A, DC Resistance (DCR)=110mΩ, Inductance=15µH, Max Operating Temperature=125°C, Self Resonant Frequency=9.5MHz, Tolerance=20%, Depth=7.3mm, Height=4.5mm, Length=7.3mm, Max DC Current=2.7A, Min Operating Temperature=-40°C, NexarPartId=31136509, Number of Pins=2, Packaging="Tape & Reel", RoHS=Compliant, Shielding=Shielded, Width=7.3mm
L2: library part CMP-14484-000247-1, "SMD Inductors 10uH ±10% 0.38A 0.468Ω 0603", Case Code (Imperial)=0603, Case Code (Metric)=1608, Current Rating=380mA, DC Resistance (DCR)=468mR, Inductance Tolerance=10%, Max Operating Temperature=105°C, Min Operating Temperature=-40°C, Package Quantity=3000, Resistor Type=Wirewound, Saturation Current=115mA, Self Resonant Frequency=32MHz, Test Frequency=2.52MHz, Case/Package=0603, Core Material=Ferrite, DC Current=380mA, Depth=1mm, Halogen Free="Halogen Free", Height=0.8mm, Height - Seated (Max)=0.039inch, Inductance=10uH, Lead Free="Lead Free", Length=0.063inch, Max DC Current=380mA, Military Standard=Not, Mount="Surface Mount", Packaging="Tape and Reel", Radiation Hardening=No, RoHS Compliant=Yes, Series=CB, Shielding=Unshielded, Termination=SMD/SMT, Tolerance=10%, Width=0.031inch
MCU1: "AVR AVRÂ® ATmega Microcontroller IC 8-Bit 16MHz 32KB (16K x 16) FLASH 44-TQFP (10x10)", Package="TQFP-44 Microchip", Check_prices=https://www.snapeda.com/parts/ATMEGA32A-AU/Microchip/view-part/?ref=eda, MF=Microchip, MP=ATMEGA32A-AU, SnapEDA_Link=https://www.snapeda.com/parts/ATMEGA32A-AU/Microchip/view-part/?ref=snap
PWR: library part CMP-03369-000114-1, "CONN HEADER R/A 4POS 4.2MM", Contact Current Rating=9A, Flammability Rating="UL94 V-0", Housing Color=Natural, Max Operating Temperature=221°C, Max Voltage Rating (AC)=600V, Min Operating Temperature=-40°C, Number of Power Positions=4, Package Quantity=400, Approvals=CSA, Circuit Application=Power, Connector System=Wire-to-Board, Connector Type=Pin, Contact Material=Brass, Contact Plating=Tin, Contact Retention="No (Without)", Contact Type="Male Pin", Current Rating=9A, ELV=Compliant, Fastening Type=Ramp, Height=0.386inch, Housing Material=Nylon, Insulation Diameter=0.122inch, Lead Free="Lead Free", Length=9.6mm, Mating Alignment="Yes (With)", Mating Retention="Yes (With)", Mount="Through Hole", Number of Circuits=4, Number Of Contacts=4, Number of Ports=1, Number of Positions=4, Number of Rows=2, Number of Terminals/Pins=4, Orientation="Right Angle", Packaging=Tray, PCB Mount Alignment="No (Without)", PCB Mount Retention=Without, PCB Mounting Orientation="Right Angle", PCB Thickness=0.063mm, Pitch=4.2mm, Plating Thickness=78.73um, Radiation Hardening=No, RoHS Compliant=Yes, Row Spacing=4.2inch, Sealable="No (Without)", Selectively Loaded="No (Without)", Series=VAL-U-LOK, Termination=Solder, VDE Tested=No, Voltage Rating=600V, Width=13mm
pwr_reg1: library part CMP-04918-000439-1, "IC REG BUCK ADJ 2A TSOT23-6", Case/Package=SOT-23-6, Max Input Voltage=28V, Max Operating Temperature=125°C, Min Input Voltage=4.5V, Min Operating Temperature=-40°C, Min Output Voltage=596mV, Output Current=2A, Quiescent Current=40uA, Switching Frequency=500kHz, Lead Free="Lead Free", Max Output Voltage=28V, Mount="Surface Mount", Number of Outputs=1, Output Configuration=Positive, Output Type=Adjustable, Packaging="Tape and Reel", RoHS Compliant=Yes, Synchronous Rectifier=Yes
Q1 Q2 Q3 Q4 Q5: library part CMP-2000-04929-2, "MOSFET N-CH 60V 115MA SOT23-3", Case/Package=SOT-23, Continuous Drain Current (ID)=115mA, Drain to Source Breakdown Voltage=70V, Drain to Source Resistance=7.5R, Drain to Source Voltage (Vdss)=60V, Gate to Source Voltage (Vgs)=20V, Input Capacitance=50pF, Max Operating Temperature=150°C, Max Power Dissipation=300mW, Min Operating Temperature=-55°C, Package Quantity=3000, Power Dissipation=540mW, Threshold Voltage=2.5V, Contact Plating=Tin, Current Rating=115mA, Dual Supply Voltage=60V, Element Configuration=Single, Fall Time=5.6ns, Height=1mm, Lead Free="Lead Free", Length=2.9mm, Mount="Surface Mount", Nominal Vgs=2.5V, Number of Channels=1, Number of Elements=1, Number of Pins=3, On-State Resistance=7.5R, Packaging="Tape and Reel", Radiation Hardening=No, Rds On Max=7.5R, REACH SVHC="No SVHC", Rise Time=3ns, Termination=SMD/SMT, Turn-Off Delay Time=11ns, Turn-On Delay Time=7ns, Voltage=60V, Voltage Rating (DC)=60V, Weight=0.000282oz, Width=1.3mm
R1: library part CMP-2000-03245-2, "511kΩ, 0.1W, 0603", Case Code (Imperial)=0603, Case Code (Metric)=1608, Max Operating Temperature=155°C, Max Power Dissipation=100mW, Min Operating Temperature=-55°C, Package Quantity=10, Temperature Coefficient=100ppm/°C, Tolerance=1%, Voltage Rating=75V, Case/Package=0603, Composition="Thick Film", Contact Plating=Tin, Depth=0.85mm, Features="Automotive AEC-Q200", Height=0.45mm, Lead Free="Lead Free", Length=1.55mm, Military Standard=Not, Mount="Surface Mount", Number of Terminations=2, Packaging="Tape and Reel", Power Rating=100mW, Radiation Hardening=No, Resistance=511k, Termination=SMD/SMT, Voltage Rating (DC)=75V, Weight=7.1E-05oz, Width=0.033inch
R2: library part CMP-2000-03245-2, "49.9Ω, 0.1W, 0603", Case Code (Imperial)=0603, Case Code (Metric)=1608, Max Operating Temperature=155°C, Max Power Dissipation=100mW, Min Operating Temperature=-55°C, Package Quantity=10, Resistance=49.9, Temperature Coefficient=100ppm/°C, Tolerance=1%, Voltage Rating=75V, Case/Package=0603, Composition="Thick Film", Contact Plating=Tin, Depth=0.85mm, Features="Automotive AEC-Q200", Height=0.45mm, Lead Free="Lead Free", Length=1.55mm, Military Standard=Not, Mount="Surface Mount", Number of Terminations=2, Packaging="Tape and Reel", Power Rating=100mW, Radiation Hardening=No, Termination=SMD/SMT, Voltage Rating (DC)=75V, Weight=7.1E-05oz, Width=0.033inch
R3: library part CMP-2000-03245-2, "105kΩ, 0.1W, 0603", Case Code (Imperial)=0603, Case Code (Metric)=1608, Max Operating Temperature=155°C, Max Power Dissipation=100mW, Min Operating Temperature=-55°C, Package Quantity=10, Temperature Coefficient=100ppm/°C, Tolerance=1%, Voltage Rating=75V, Case/Package=0603, Composition="Thick Film", Contact Plating=Tin, Depth=0.85mm, Features="Automotive AEC-Q200", Height=0.45mm, Lead Free="Lead Free", Length=1.55mm, Military Standard=Not, Mount="Surface Mount", Number of Terminations=2, Packaging="Tape and Reel", Power Rating=100mW, Radiation Hardening=No, Resistance=105k, Termination=SMD/SMT, Voltage Rating (DC)=75V, Weight=7.1E-05oz, Width=0.033inch
R4: library part CMP-2000-03245-2, "100kΩ, 0.1W, 0603", Case Code (Imperial)=0603, Case Code (Metric)=1608, Max Operating Temperature=155°C, Max Power Dissipation=100mW, Min Operating Temperature=-55°C, Package Quantity=10, Temperature Coefficient=100ppm/°C, Tolerance=1%, Voltage Rating=75V, Case/Package=0603, Composition="Thick Film", Contact Plating=Tin, Depth=0.85mm, Features="Automotive AEC-Q200", Height=0.45mm, Lead Free="Lead Free", Length=1.55mm, Military Standard=Not, Mount="Surface Mount", Number of Terminations=2, Packaging="Tape and Reel", Power Rating=100mW, Radiation Hardening=No, Resistance=100k, Termination=SMD/SMT, Voltage Rating (DC)=75V, Weight=7.1E-05oz, Width=0.033inch
R5: library part CMP-2000-03245-2, "13.3kΩ, 0.1W, 0603", Case Code (Imperial)=0603, Case Code (Metric)=1608, Max Operating Temperature=155°C, Max Power Dissipation=100mW, Min Operating Temperature=-55°C, Package Quantity=10, Temperature Coefficient=100ppm/°C, Tolerance=1%, Voltage Rating=75V, Case/Package=0603, Composition="Thick Film", Contact Plating=Tin, Depth=0.85mm, Features="Automotive AEC-Q200", Height=0.45mm, Lead Free="Lead Free", Length=1.55mm, Military Standard=Not, Mount="Surface Mount", Number of Terminations=2, Packaging="Tape and Reel", Power Rating=100mW, Radiation Hardening=No, Resistance=13.3k, Termination=SMD/SMT, Voltage Rating (DC)=75V, Weight=7.1E-05oz, Width=0.033inch
R6 R9 R10: library part CMP-2000-03245-2, "10kΩ, 0.1W, 0603", Case Code (Imperial)=0603, Case Code (Metric)=1608, Max Operating Temperature=155°C, Max Power Dissipation=100mW, Min Operating Temperature=-55°C, Package Quantity=10, Temperature Coefficient=100ppm/°C, Tolerance=1%, Voltage Rating=75V, Case/Package=0603, Composition="Thick Film", Contact Plating=Tin, Depth=0.85mm, Features="Automotive AEC-Q200", Height=0.45mm, Lead Free="Lead Free", Length=1.55mm, Military Standard=Not, Mount="Surface Mount", Number of Terminations=2, Packaging="Tape and Reel", Power Rating=100mW, Radiation Hardening=No, Resistance=10k, Termination=SMD/SMT, Voltage Rating (DC)=75V, Weight=7.1E-05oz, Width=0.033inch
R7: library part CMP-2000-03245-2, "220kΩ, 0.1W, 0603", Case Code (Imperial)=0603, Case Code (Metric)=1608, Max Operating Temperature=155°C, Max Power Dissipation=100mW, Min Operating Temperature=-55°C, Package Quantity=10, Resistance=10k, Temperature Coefficient=100ppm/°C, Tolerance=1%, Voltage Rating=75V, Case/Package=0603, Composition="Thick Film", Contact Plating=Tin, Depth=0.85mm, Features="Automotive AEC-Q200", Height=0.45mm, Lead Free="Lead Free", Length=1.55mm, Military Standard=Not, Mount="Surface Mount", Number of Terminations=2, Packaging="Tape and Reel", Power Rating=100mW, Radiation Hardening=No, Termination=SMD/SMT, Voltage Rating (DC)=75V, Weight=7.1E-05oz, Width=0.033inch
R8: library part CMP-2000-03245-2, "150kΩ, 0.1W, 0603", Case Code (Imperial)=0603, Case Code (Metric)=1608, Max Operating Temperature=155°C, Max Power Dissipation=100mW, Min Operating Temperature=-55°C, Package Quantity=10, Resistance=10k, Temperature Coefficient=100ppm/°C, Tolerance=1%, Voltage Rating=75V, Case/Package=0603, Composition="Thick Film", Contact Plating=Tin, Depth=0.85mm, Features="Automotive AEC-Q200", Height=0.45mm, Lead Free="Lead Free", Length=1.55mm, Military Standard=Not, Mount="Surface Mount", Number of Terminations=2, Packaging="Tape and Reel", Power Rating=100mW, Radiation Hardening=No, Termination=SMD/SMT, Voltage Rating (DC)=75V, Weight=7.1E-05oz, Width=0.033inch
R11: library part CMP-2000-03245-2, "50kΩ, 0.1W, 0603", Case Code (Imperial)=0603, Case Code (Metric)=1608, Max Operating Temperature=155°C, Max Power Dissipation=100mW, Min Operating Temperature=-55°C, Package Quantity=10, Resistance=10k, Temperature Coefficient=100ppm/°C, Tolerance=1%, Voltage Rating=75V, Case/Package=0603, Composition="Thick Film", Contact Plating=Tin, Depth=0.85mm, Features="Automotive AEC-Q200", Height=0.45mm, Lead Free="Lead Free", Length=1.55mm, Military Standard=Not, Mount="Surface Mount", Number of Terminations=2, Packaging="Tape and Reel", Power Rating=100mW, Radiation Hardening=No, Termination=SMD/SMT, Voltage Rating (DC)=75V, Weight=7.1E-05oz, Width=0.033inch
RST1: library part CMP-1676-00001-5, "Male Header, Pitch 2.54 mm, 1 x 3 Position, Height 8.38 mm, Tail Length 3.18 mm, RoHS, Bulk", Colour=Black, Current Rating="4 A", Manufacturer=Molex, Max Operating Temperature="75 degC", Min Operating Temperature="0 degC", Package Quantity=1, Voltage Rating="250 V", ComponentLink1Description="Manufacturer URL", ComponentLink1URL=http://www.molex.com/, ComponentLink2Description=Datasheet, ComponentLink2URL=http://www.molex.com/pdm_docs/sd/022284033_sd.pdf, Contact Finish=Gold, Contact Material=Brass, Contact Plating=Gold, DatasheetVersion="Rev. G, 01/2012", Height="8.38 mm", Lead Pitch="0.1 inch", Length="7.62 mm", Mount="Through Hole", Mounting Technology="Through Hole", PackageDescription="Male Header, Pitch 2.54 mm, 1 x 3 Position, Height 8.38 mm, Tail Length 3.18 mm", PackageReference=22-28-4033, Packaging=Bulk, Pins=3, REACH SVHC=Unknown, RoHSCompliant=true, Rows=1
XTAL1: library part CMP-96504-000007-1, "LFXTAL055663REEL / CRYSTAL 8.0000MHZ 18PF SMD", RoHS Compliant=Yes

## Via types
v1: diameter 0.5, hole 0.305, Top Layer to Bottom Layer, tented both sides, 546 vias
v2: diameter 0.457, hole 0.305, Top Layer to Bottom Layer, tented both sides, 66 vias
v3: diameter 5, hole 3.1, Top Layer to Bottom Layer, 4 vias
v4: diameter 1.27, hole 0.711, Top Layer to Bottom Layer, tented both sides, 3 vias

## Nets (pads, with @x,y where several pads share a name; then routed paths per layer and width w, separated by ;. In a path a pad name is that pad's centre, name@x,y a point inside that pad or via, vN(x,y) a via of type N, cw(c..) or ccw(c..) an arc to the next point about the centre after c; other vN are vias at no path point)
4V865: Q1.1 Q5.1 R7.1 R8.2 | length 6.3
  Top Layer w0.381: Q5.1 144.175,64.325 Q1.1@144.175,65.818 ; Q1.1@144.162,65.819 144.129,65.852 144.163,65.818 Q1.1@144.175,65.818 ; Q1.1 144.175,65.825 Q1.1@144.175,65.818 ; R8.2 146.219,65.818 Q1.1@144.175,65.818
  Top Layer w0.762: R7.1 R8.2
BLINK1: I/O.8 K3.1 K4.3 | length 120.7
  Bottom Layer w0.762: K3.1 96.042,88.169 K4.3 107.06,107.949 109.093,109.982 165.67,109.982 166.37,109.282 166.37,80.47 I/O.8
BLINK2: I/O.9 K4.1 | length 116.7
  Bottom Layer w0.762: K4.1 99.433,111.76 165.862,111.76 168.021,109.601 168.021,77.921 I/O.9
BLINK_SWITCH_(GND): D4.2 I/O.6 K4.5 MCU1.14 | length 113.1
  Top Layer w0.254: v2(134.6,69.8) 134.623,69.823 134.623,72.215 MCU1.14 MCU1.14@134.633,72.25
  Top Layer w0.554: 111.252,96.282 126.818,96.282 v4(130.2,92.9)
  Top Layer w0.762: K4.5 108.139,93.187 111.234,96.282 111.252,96.282 D4.2
  Bottom Layer w0.254: v2(134.6,69.8) 136.6,67.8 147.7,67.8 154.3,74.4 154.3,80.64 157.671,84.01 161.511,84.01 I/O.6
  Bottom Layer w0.554: v4(130.2,92.9) 130.2,92.8 134.721,88.279 159.321,88.279 161.485,86.115 I/O.6
BLINKRES_SIG: MCU1.42 Q4.1 | length 24.5
  Top Layer w0.254: Q4.1 117.817,78.298 122.019,82.5 v2(126.3,82.5) ; v2(134.481,82.439) 134.481,82.494 134.645,82.659 MCU1.42
  Bottom Layer w0.254: v2(126.3,82.5) 126.4,82.6 132.031,82.6 132.19,82.759 133.193,82.759 133.493,82.459 134.461,82.459 v2(134.481,82.439)
BULB_OUT: I/O.21 K2.1 | length 150.3
  Top Layer w0.762: K2.1 88.6,67.018 88.6,49.9 103.6,34.9 161,34.9 167.5,41.4 167.5,70.1 166.2,71.4 162.278,71.4 160.534,73.144 158.486,73.144 I/O.21
BUZZER: I/O.11 MCU1.16 | length 38.7
  Top Layer w0.254: v2(135.4,64.8) 135.4,68.654 136.246,69.5 MCU1.16
  Bottom Layer w0.254: v2(135.4,64.8) 135.4,64.745 135.771,64.374 135.771,64.129 137.997,61.903 155.883,61.903 156.845,62.865 159.258,62.865 161.508,65.115 I/O.11
DISP_KEY: I/O.19 MCU1.13 | length 37.6
  Top Layer w0.254: MCU1.13 133.833,69.24 v2(133.858,69.215)
  Bottom Layer w0.254: v2(133.858,69.215) 136.273,66.8 148.2,66.8 155.3,73.9 155.3,79.1 I/O.19
FOTO: I/O.23 MCU1.36 R11.2 | length 31
  Top Layer w0.254: MCU1.36 139.548,83.591 139.548,83.027 139.7,82.875 139.7,82.866 139.827,82.739 139.827,76.2 141.757,74.27 141.757,73.62 145.401,69.977 148.323,69.977 R11.2 148.7,69.564 149.104,69.159 149.141,69.159 150.941,67.359 155.041,67.359 156.817,65.583 157.647,65.583 I/O.23
GND: C2.2 C3.2 C4.2 C5.2 C7.1 C8.1 C9.2 C10.2 C11.2 C12.2 C13.2 C14.2 C15.2 C16.2 C17.2 ISP1.8 ISP1.10 MCU1.6 MCU1.18 MCU1.28 MCU1.39 PWR.4 pwr_reg1.1 Q1.2 Q2.2 Q3.2 Q4.2 R3.2 R5.2 R8.1 R9.2 RST1.1 XTAL1.2 XTAL1.4
  other v1: 92.71,35.56 95.25,35.56 97.79,35.56 100.33,35.56 163.83,35.56 166.37,35.56 168.91,35.56 91.44,38.1 93.98,38.1 99.06,38.1 132.08,38.1 134.62,38.1 137.16,38.1 139.7,38.1 142.24,38.1 144.78,38.1 147.32,38.1 149.86,38.1 152.4,38.1 154.94,38.1 160.02,38.1 167.64,38.1 170.18,38.1 87.63,40.64 90.17,40.64 105.41,40.64 107.95,40.64 158.75,40.64 168.91,40.64 171.45,40.64 173.99,40.64 176.53,40.64 86.36,43.18 88.9,43.18 91.44,43.18 93.98,43.18 101.6,43.18 106.68,43.18 111.76,43.18 114.3,43.18 116.84,43.18 119.38,43.18 121.92,43.18 124.46,43.18 127,43.18 129.54,43.18 137.16,43.18 139.7,43.18 142.24,43.18 144.78,43.18 147.32,43.18 152.4,43.18 154.94,43.18 157.48,43.18 170.18,43.18 172.72,43.18 175.26,43.18 87.63,45.72 90.17,45.72 97.79,45.72 102.87,45.72 105.41,45.72 107.95,45.72 118.11,45.72 120.65,45.72 123.19,45.72 125.73,45.72 146.05,45.72 148.59,45.72 153.67,45.72 156.21,45.72 158.75,45.72 168.91,45.72 171.45,45.72 173.99,45.72 176.53,45.72 86.36,48.26 88.9,48.26 93.98,48.26 96.52,48.26 101.6,48.26 104.14,48.26 109.22,48.26 114.3,48.26 116.84,48.26 121.92,48.26 124.46,48.26 127,48.26 147.32,48.26 149.86,48.26 152.4,48.26 160.02,48.26 170.18,48.26 172.72,48.26 175.26,48.26 87.63,50.8 92.71,50.8 95.25,50.8 97.79,50.8 102.87,50.8 105.41,50.8 107.95,50.8 113.03,50.8 118.11,50.8 123.19,50.8 143.51,50.8 146.05,50.8 148.59,50.8 151.13,50.8 153.67,50.8 168.91,50.8 171.45,50.8 173.99,50.8 176.53,50.8 86.36,53.34 96.52,53.34 101.6,53.34 121.92,53.34 137.16,53.34 144.78,53.34 147.32,53.34 149.86,53.34 152.4,53.34 154.94,53.34 157.48,53.34 160.02,53.34 162.56,53.34 170.18,53.34 172.72,53.34 175.26,53.34 87.63,55.88 92.71,55.88 97.79,55.88 102.87,55.88 107.95,55.88 110.49,55.88 113.03,55.88 118.11,55.88 143.51,55.88 146.05,55.88 148.59,55.88 161.29,55.88 163.83,55.88 168.91,55.88 171.45,55.88 173.99,55.88 176.53,55.88 86.36,58.42 101.6,58.42 109.22,58.42 111.76,58.42 114.3,58.42 116.84,58.42 119.38,58.42 121.92,58.42 129.54,58.42 132.08,58.42 134.62,58.42 137.16,58.42 144.78,58.42 147.32,58.42 152.4,58.42 157.48,58.42 160.02,58.42 162.56,58.42 170.18,58.42 172.72,58.42 175.26,58.42 87.63,60.96 90.17,60.96 92.71,60.96 95.25,60.96 97.79,60.96 105.41,60.96 107.95,60.96 120.65,60.96 123.19,60.96 125.73,60.96 128.27,60.96 130.81,60.96 133.35,60.96 135.89,60.96 161.29,60.96 168.91,60.96 173.99,60.96 176.53,60.96 86.36,63.5 91.44,63.5 93.98,63.5 96.52,63.5 106.68,63.5 109.22,63.5 114.3,63.5 116.84,63.5 121.92,63.5 124.46,63.5 127,63.5 129.54,63.5 132.08,63.5 139.7,63.5 149.86,63.5 152.4,63.5 154.94,63.5 162.56,63.5 170.18,63.5 172.72,63.5 175.26,63.5 87.63,66.04 90.17,66.04 92.71,66.04 95.25,66.04 97.79,66.04 113.03,66.04 115.57,66.04 118.11,66.04 125.73,66.04 128.27,66.04 130.81,66.04 153.67,66.04 168.91,66.04 171.45,66.04 173.99,66.04 176.53,66.04 86.36,68.58 91.44,68.58 93.98,68.58 96.52,68.58 101.6,68.58 106.68,68.58 109.22,68.58 114.3,68.58 116.84,68.58 119.38,68.58 121.92,68.58 127,68.58 129.54,68.58 170.18,68.58 172.72,68.58 175.26,68.58 87.63,71.12 90.17,71.12 95.25,71.12 97.79,71.12 102.87,71.12 113.03,71.12 115.57,71.12 118.11,71.12 120.65,71.12 130.81,71.12 158.75,71.12 168.91,71.12 171.45,71.12 173.99,71.12 176.53,71.12 86.36,73.66 88.9,73.66 91.44,73.66 93.98,73.66 96.52,73.66 101.6,73.66 106.68,73.66 109.22,73.66 111.76,73.66 114.3,73.66 116.84,73.66 119.38,73.66 121.92,73.66 134.62,73.66 167.64,73.66 170.18,73.66 172.72,73.66 175.26,73.66 87.63,76.2 90.17,76.2 95.25,76.2 97.79,76.2 110.49,76.2 113.03,76.2 115.57,76.2 118.11,76.2 120.65,76.2 151.13,76.2 161.29,76.2 168.91,76.2 171.45,76.2 173.99,76.2 176.53,76.2 86.36,78.74 88.9,78.74 91.44,78.74 93.98,78.74 96.52,78.74 99.06,78.74 101.6,78.74 106.68,78.74 109.22,78.74 119.38,78.74 152.4,78.74 160.02,78.74 170.18,78.74 172.72,78.74 175.26,78.74 140.9,79.1 134.7,80 87.63,81.28 90.17,81.28 92.71,81.28 95.25,81.28 97.79,81.28 100.33,81.28 113.03,81.28 115.57,81.28 118.11,81.28 123.19,81.28 125.73,81.28 151.13,81.28 171.45,81.28 173.99,81.28 176.53,81.28 86.36,83.82 88.9,83.82 91.44,83.82 93.98,83.82 96.52,83.82 99.06,83.82 101.6,83.82 106.68,83.82 109.22,83.82 114.3,83.82 116.84,83.82 119.38,83.82 121.92,83.82 124.46,83.82 127,83.82 162.56,83.82 165.1,83.82 170.18,83.82 172.72,83.82 175.26,83.82 87.63,86.36 90.17,86.36 92.71,86.36 95.25,86.36 97.79,86.36 100.33,86.36 105.41,86.36 107.95,86.36 110.49,86.36 113.03,86.36 115.57,86.36 118.11,86.36 120.65,86.36 135.89,86.36 138.43,86.36 140.97,86.36 156.21,86.36 171.45,86.36 173.99,86.36 176.53,86.36 86.36,88.9 88.9,88.9 99.06,88.9 101.6,88.9 114.3,88.9 116.84,88.9 119.38,88.9 121.92,88.9 124.46,88.9 127,88.9 129.54,88.9 165.1,88.9 170.18,88.9 172.72,88.9 175.26,88.9 87.63,91.44 90.17,91.44 92.71,91.44 95.25,91.44 97.79,91.44 102.87,91.44 107.95,91.44 110.49,91.44 113.03,91.44 115.57,91.44 118.11,91.44 120.65,91.44 123.19,91.44 125.73,91.44 133.35,91.44 138.43,91.44 140.97,91.44 143.51,91.44 146.05,91.44 171.45,91.44 173.99,91.44 176.53,91.44 86.36,93.98 88.9,93.98 91.44,93.98 96.52,93.98 99.06,93.98 111.76,93.98 114.3,93.98 116.84,93.98 119.38,93.98 121.92,93.98 124.46,93.98 127,93.98 132.08,93.98 139.7,93.98 142.24,93.98 144.78,93.98 147.32,93.98 149.86,93.98 170.18,93.98 172.72,93.98 175.26,93.98 87.63,96.52 90.17,96.52 92.71,96.52 95.25,96.52 97.79,96.52 100.33,96.52 107.95,96.52 130.81,96.52 133.35,96.52 138.43,96.52 140.97,96.52 143.51,96.52 146.05,96.52 148.59,96.52 151.13,96.52 163.83,96.52 171.45,96.52 173.99,96.52 176.53,96.52 86.36,99.06 88.9,99.06 91.44,99.06 93.98,99.06 96.52,99.06 99.06,99.06 101.6,99.06 109.22,99.06 114.3,99.06 116.84,99.06 119.38,99.06 121.92,99.06 124.46,99.06 139.7,99.06 142.24,99.06 144.78,99.06 147.32,99.06 149.86,99.06 170.18,99.06 172.72,99.06 175.26,99.06 87.63,101.6 90.17,101.6 92.71,101.6 95.25,101.6 97.79,101.6 100.33,101.6 105.41,101.6 113.03,101.6 115.57,101.6 118.11,101.6 120.65,101.6 123.19,101.6 125.73,101.6 140.97,101.6 143.51,101.6 146.05,101.6 148.59,101.6 151.13,101.6 153.67,101.6 171.45,101.6 173.99,101.6 176.53,101.6 86.36,104.14 88.9,104.14 96.52,104.14 99.06,104.14 101.6,104.14 109.22,104.14 114.3,104.14 116.84,104.14 119.38,104.14 121.92,104.14 124.46,104.14 127,104.14 129.54,104.14 132.08,104.14 134.62,104.14 137.16,104.14 139.7,104.14 142.24,104.14 144.78,104.14 152.4,104.14 165.1,104.14 170.18,104.14 172.72,104.14 175.26,104.14 87.63,106.68 90.17,106.68 97.79,106.68 100.33,106.68 102.87,106.68 105.41,106.68 110.49,106.68 113.03,106.68 115.57,106.68 118.11,106.68 120.65,106.68 123.19,106.68 125.73,106.68 128.27,106.68 130.81,106.68 133.35,106.68 135.89,106.68 138.43,106.68 140.97,106.68 143.51,106.68 146.05,106.68 151.13,106.68 153.67,106.68 156.21,106.68 161.29,106.68 173.99,106.68 176.53,106.68 91.44,109.22 93.98,109.22 99.06,109.22 101.6,109.22 104.14,109.22 106.68,109.22 170.18,109.22 172.72,109.22 175.26,109.22 92.71,111.76 95.25,111.76 97.79,111.76 168.91,111.76 171.45,111.76 173.99,111.76 176.53,111.76
  other v2: 133.477,42.164 134.239,42.164 132.588,43.18 132.6,44 127.4,45.3 127.4,46.5 128.1,47.4 128.1,48.3 133.096,51.689 133.985,51.689 143.1,51.8 143.129,52.705 133,53.3 133.9,53.3 134.8,53.3 135.8,53.3 141.351,53.594 142.113,53.594 142.8,55.5 142.769,56.536 142.8,57.5 142.8,58.5 141.2,59.2 142,59.2
  other v3: 88,36.5 174,36.5 149,104.5 88,110.5
IDLE: MCU1.19 Q1.3 | length 6.9
  Top Layer w0.254: MCU1.19 138.633,70.298 141.806,67.125 141.806,67.075 142.079,66.802 Q1.3@142.129,66.802
LCD_5V: I/O.4 Q5.2 | length 46.4
  Top Layer w0.254: Q5.2 142.25,64.35 143.11,65.21 143.11,66.006 143.905,66.8 149.5,66.8 149.881,66.419 149.881,66.243 150.3,65.823 v2(150.3,65.8) ; v2(155.9,71.3) 155.9,82.9 157,84 160.4,84 161.6,85.2 v2(161.6,88)
  Bottom Layer w0.254: v2(150.3,65.8) 155.761,71.261 155.861,71.261 v2(155.9,71.3) ; v2(161.6,88) 161.6,92.5 I/O.4
LCD_D4: I/O.16 MCU1.23 | length 31
  Top Layer w0.254: MCU1.23 143.256,73.99 143.383,73.863 143.383,73.817 143.9,73.3 v2(145,73.3) ; v2(147.828,84.328) 147.867,84.367 147.967,84.367 I/O.16
  Bottom Layer w0.254: v2(145,73.3) 145.039,73.339 145.54,73.339 149.29,77.089 149.29,83.312 148.314,84.288 147.923,84.288 147.883,84.328 v2(147.828,84.328)
LCD_D5: I/O.3 MCU1.24 | length 35.4
  Top Layer w0.254: MCU1.24 142.786,74.79 144.513,74.79 v2(144.526,74.803) ; v2(147.828,82.804) 157.808,92.784 158.832,92.784 160.989,94.942 160.989,95.584 163.615,98.21 I/O.3
  Bottom Layer w0.254: v2(144.526,74.803) 145.734,74.803 148.274,77.343 148.274,82.551 148.06,82.765 147.867,82.765 v2(147.828,82.804)
LCD_D6: I/O.2 MCU1.25 | length 39.2
  Top Layer w0.254: MCU1.25 142.786,75.578 144.132,75.578 v2(144.145,75.565) ; v2(146.939,83.439) 146.939,84.709 156.242,94.012 156.242,95.091 157.418,96.266 160.274,96.266 161.671,97.663 161.671,100.971 I/O.2
  Bottom Layer w0.254: v2@144.147,75.567 145.057,75.567 147.216,77.726 147.216,83.189 146.965,83.439 v2(146.939,83.439)
LCD_D7: I/O.1 MCU1.26 | length 42.4
  Top Layer w0.254: MCU1.26 142.799,76.352 143.739,76.352 v2(143.764,76.327) ; v2(146.05,82.804) 146.05,85.217 155.321,94.488 155.321,95.758 156.547,96.984 159.595,96.984 160.655,98.044 160.655,104.155 I/O.1
  Bottom Layer w0.254: v2@143.773,76.336 144.493,76.336 146.232,78.075 146.232,82.567 146.05,82.749 v2(146.05,82.804)
LCD_E: I/O.15 MCU1.22 | length 37.1
  Top Layer w0.254: MCU1.22 141.021,71.196 141.097,71.12 v2(141.097,70.993) ; v2(145.161,83.82) 145.161,85.598 154.432,94.869 154.432,96.266 156.413,98.247 157.647,98.247 I/O.15
  Bottom Layer w0.254: v2(141.097,70.993) 141.605,70.993 143.205,72.593 143.205,76.657 145.237,78.689 145.237,83.6 145.2,83.637 145.2,83.781 v2(145.161,83.82)
LCD_RS: I/O.13 MCU1.20 | length 45.3
  Top Layer w0.254: MCU1.20 139.421,71.018 v2(139.446,70.993) ; v2(143.394,86.698) 143.449,86.698 143.806,87.055 144.078,87.055 152.654,95.631 152.654,101.654 I/O.13
  Bottom Layer w0.254: v2(139.446,70.993) 139.446,71.755 141.224,73.533 141.224,77.216 143.2,79.192 143.2,86.449 143.394,86.643 v2(143.394,86.698)
LCD_RW: I/O.14 MCU1.21 | length 40.7
  Top Layer w0.254: v2(140.208,70.993) 140.221,71.006 140.221,72.225 MCU1.21 ; v2(144.3,85.6) 144.3,85.655 144.617,85.972 144.617,86.324 153.543,95.25 153.543,98.343 I/O.14
  Bottom Layer w0.254: v2(140.208,70.993) 142.24,73.025 142.24,76.962 144.281,79.003 144.281,82.564 144.127,82.718 144.127,85.372 144.3,85.545 v2(144.3,85.6)
LED_OUT: I/O.22 K2.4 | length 126.6
  Top Layer w0.762: K2.4 90.4,56.818 90.4,50.5 104.319,36.581 160.381,36.581 165.8,42 165.8,66.754 165.354,67.2 161.7,67.2 161.3,67.6 161.3,67.7 160.056,68.944 158.486,68.944 I/O.22